# EAGLE board untitled (EAGLE 5.02)
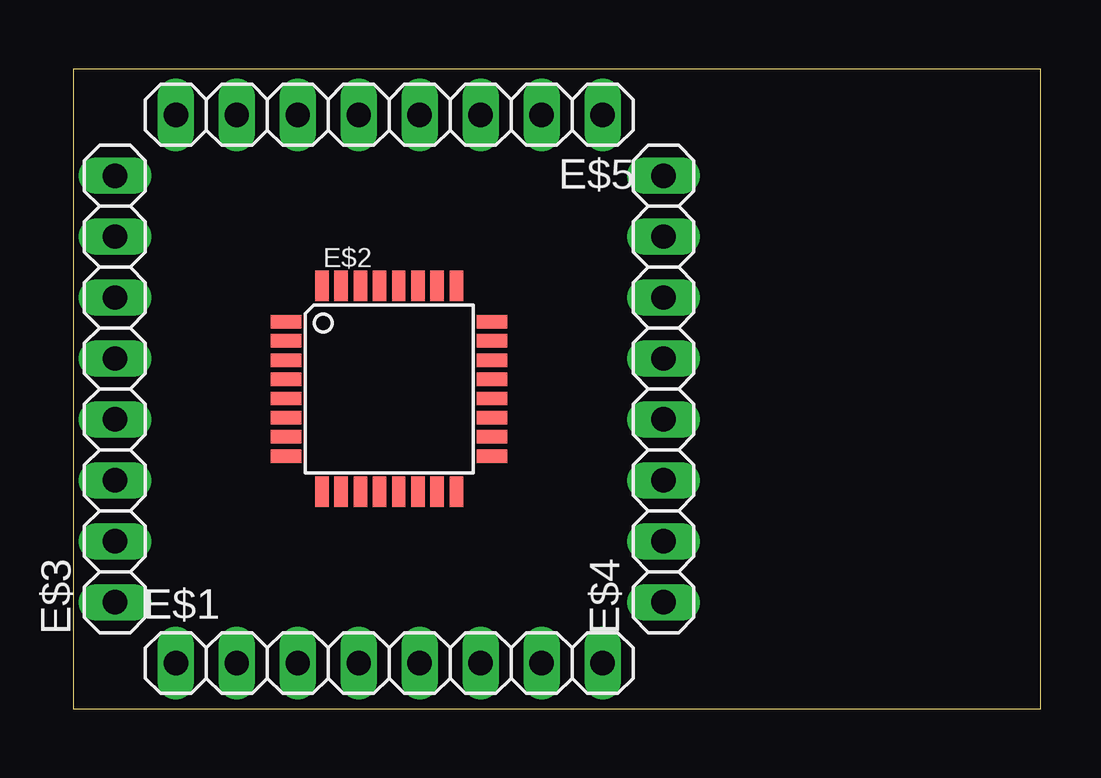
[diagram p0: board, top side]
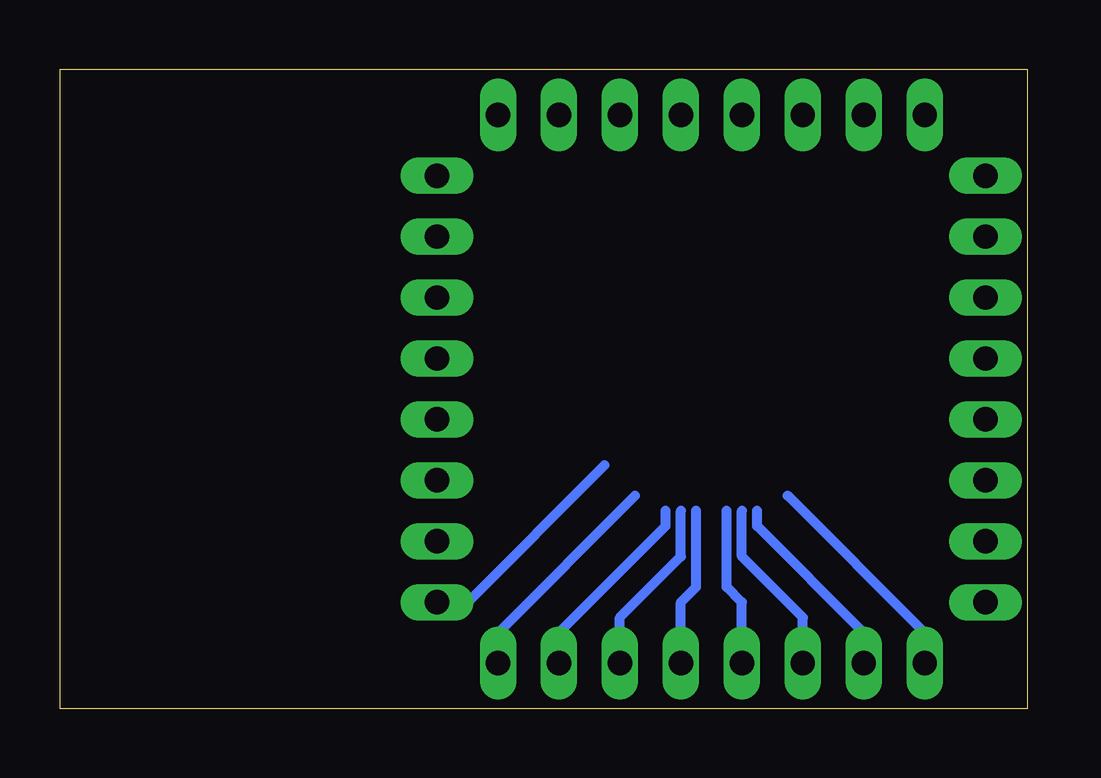
[diagram p1: board, bottom side, seen from below]

Size 40.31 x 26.66 mm. Coordinates in mm from the lower left corner, seen from the top.
Outline: 0,0 40.31,0 40.31,26.66 0,26.66 0,0
Copper layers (1*16): Top 0.035mm / dielectric 1.5mm / Bottom 0.035mm
Design rules "default": minimum track width 10mil, minimum drill 24mil, track to track 8mil, track to pad 8mil, pad to pad 8mil, via to via 8mil, smd to smd 8mil, copper to edge 40mil, drill to drill 8mil, minimum pad ring 10mil, minimum via ring 8mil, stop-mask expansion 4mil, vias tented up to drill 0mil, thermal gap 10mil

## Footprints (pad centres in the part's own frame; a part is rotated, then mirrored left to right if it is on the bottom)
1X08 = drill 1.016 long: 1 -8.89,0; 2 -6.35,0; 3 -3.81,0; 4 -1.27,0; 5 1.27,0; 6 3.81,0; 7 6.35,0; 8 8.89,0
TQFP32-08 = smd 1.27 x 0.559: 1 -4.293,2.8; 2 -4.293,2; 3 -4.293,1.2; 4 -4.293,0.4; 5 -4.293,-0.4; 6 -4.293,-1.2; 7 -4.293,-2; 8 -4.293,-2.8; 17 4.293,-2.8; 18 4.293,-2; 19 4.293,-1.2; 20 4.293,-0.4; 21 4.293,0.4; 22 4.293,1.2; 23 4.293,2; 24 4.293,2.8 | smd 0.559 x 1.27: 9 -2.8,-4.293; 10 -2,-4.293; 11 -1.2,-4.293; 12 -0.4,-4.293; 13 0.4,-4.293; 14 1.2,-4.293; 15 2,-4.293; 16 2.8,-4.293; 25 2.8,4.293; 26 2,4.293; 27 1.2,4.293; 28 0.4,4.293; 29 -0.4,4.293; 30 -1.2,4.293; 31 -2,4.293; 32 -2.8,4.293

## Placement (x,y rotation side)
E$1  [1X08]  13.17,1.9 0 top
E$2  [TQFP32-08]  13.17,13.33 0 top
E$3  [1X08]  1.74,13.33 90 top
E$4  [1X08]  24.6,13.33 90 top
E$5  [1X08]  13.17,24.76 180 top

## Library data of the parts
E$1-E$5 = teste_AT90USB162

## Nets
S$1: E$1.1
S$2: E$1.2
S$3: E$1.3
S$6: E$1.6
S$7: E$1.7
S$8: E$1.8
S$9: E$4.1

## Tracks (layer width: path | path; a pad name or v marks a point on that pad's centre or on a via)
S$1
  Bottom 0.406: E$1.1 4.28,3.17 9.99,8.88
S$2
  Bottom 0.406: E$1.2 6.82,3.17 11.26,7.62 11.26,8.25
S$3
  Bottom 0.406: E$1.3 9.36,3.81 11.9,6.35 11.9,8.25
S$4
  Bottom 0.406: 11.9,2.53 11.9,4.44 12.54,5.08 12.54,8.25
S$5
  Bottom 0.406: 14.44,2.53 14.44,4.44 13.8,5.08 13.8,8.25
S$6
  Bottom 0.406: E$1.6 16.98,3.81 14.44,6.35 14.44,8.25
S$7
  Bottom 0.406: E$1.7 19.52,3.17 15.07,7.62 15.07,8.25
S$8
  Bottom 0.406: E$1.8 22.06,3.17 16.34,8.88
S$9
  Bottom 0.406: E$4.1 23.33,4.44 17.61,10.15